# Altium PCB AMS_Slave.PcbDoc (part 2 of 2)
Units mm, origin at the board's own origin, x right, y up, seen from the top; angles counter-clockwise.
Board outline 75.06 x 58.17 mm, 2 copper layers (Top Layer, Bottom Layer); 190 components, 132 nets, 535 pads, 278 vias.
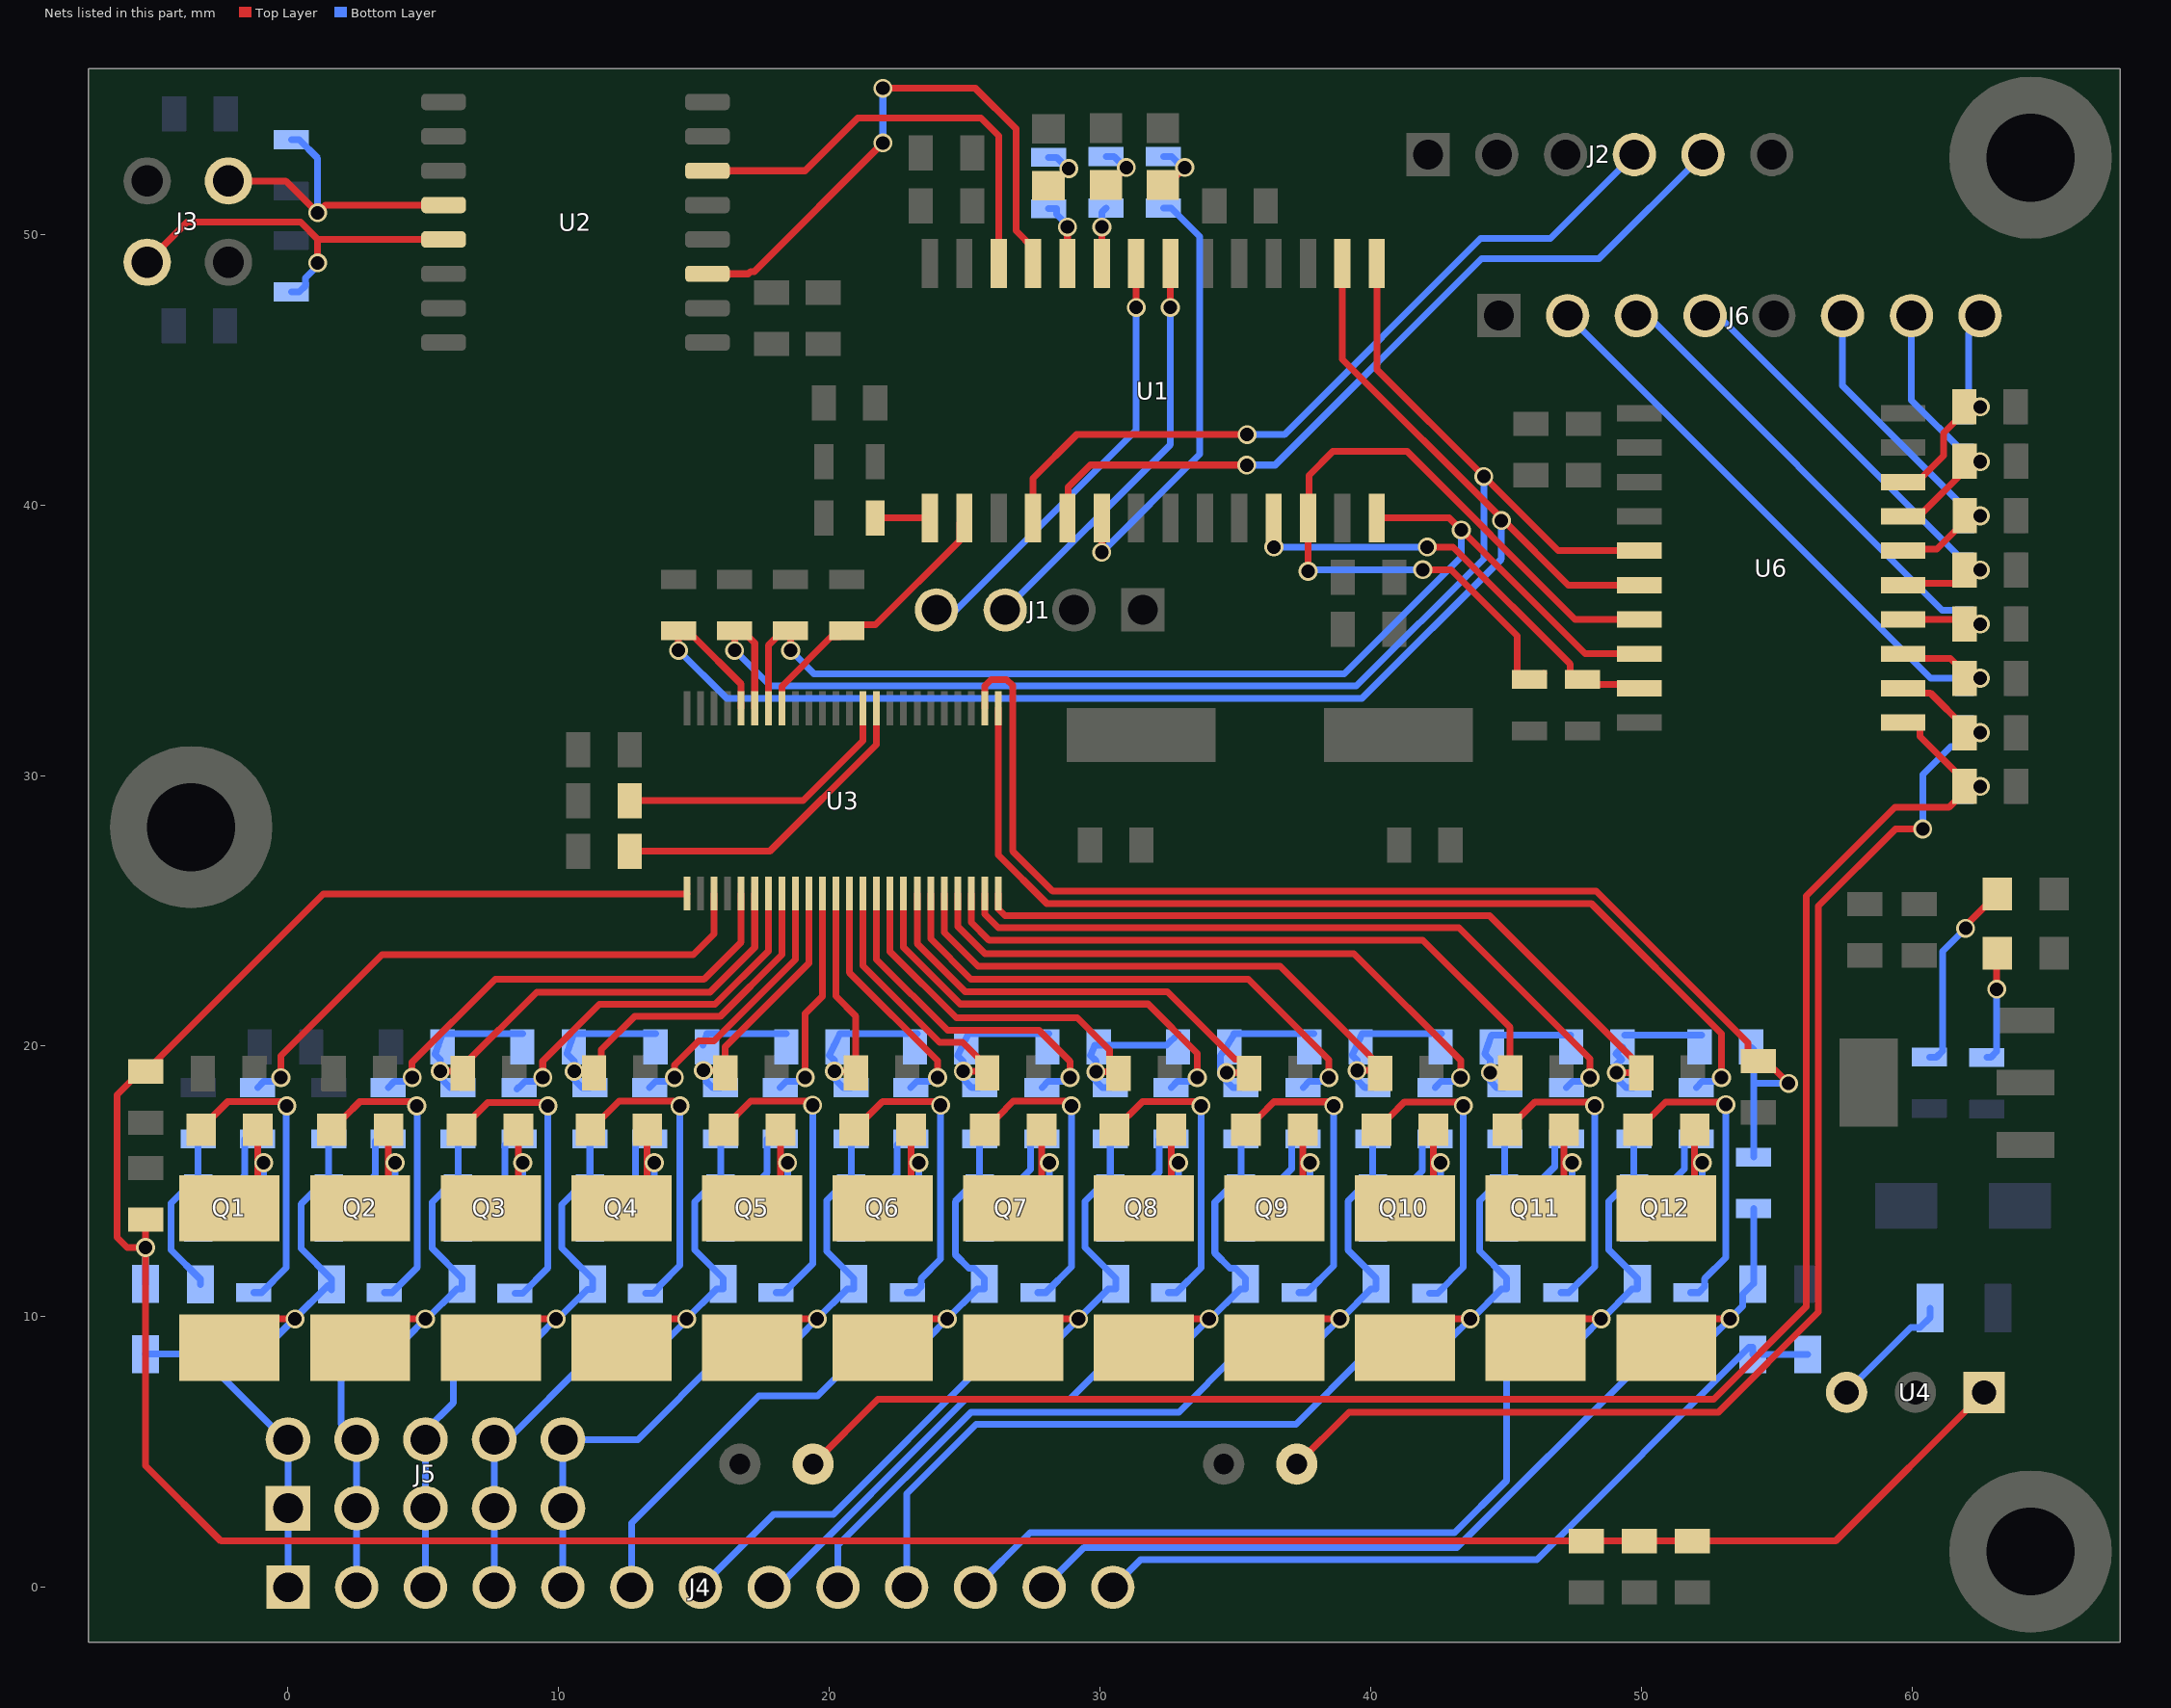
[diagram p2: the nets of this part, all layers, seen from the top]

## Via types
v1: diameter 0.7, hole 0.5, Top Layer to Bottom Layer, 201 vias
v2: diameter 0.8, hole 0.5, Top Layer to Bottom Layer, 76 vias
v3: diameter 0.6, hole 0.5, Top Layer to Bottom Layer, 1 vias

## Nets (pads, with @x,y where several pads share a name; then routed paths per layer and width w, separated by ;. In a path a pad name is that pad's centre, name@x,y a point inside that pad or via, vN(x,y) a via of type N, cw(c..) or ccw(c..) an arc to the next point about the centre after c; other vN are vias at no path point) (continued)
NetC15_2: C15.2 C28.1 C29.2 R46.2 U3.6 | length 21.4
  Top Layer w0.25: v1(5.628,19.076) 6.376,19.076 C15.2@6.459,18.993 6.459,19.267 9.186,21.994 15.593,21.994 17.247,23.649 U3.6@17.247,25.638
  Bottom Layer w0.25: R46.2@6.284,18.468 5.984,18.468 5.759,18.693 5.759,18.722 5.488,18.993 5.57,19.076 v1(5.628,19.076) 5.628,19.499 5.434,19.693 5.556,20.024 5.718,20.465 C29.2@8.668,20.465
NetC16_2: C16.2 C29.1 C30.2 R47.2 U3.8 | length 18
  Top Layer w0.25: v1(10.575,19.068) 11.209,19.068 11.284,18.993 C16.2@11.309,19.018 11.581,19.29 11.581,19.876 12.799,21.094 15.966,21.094 18.247,23.376 U3.8@18.247,25.638
  Bottom Layer w0.25: C29.1@10.559,20.463 10.41,20.018 10.309,19.718 10.575,19.452 v1(10.575,19.068) 10.438,19.068 10.363,18.993 10.634,18.722 10.634,18.693 10.859,18.468 R47.2@11.159,18.468 ; C29.1@10.559,20.465 C30.2@13.584,20.465
NetC17_2: C17.2 C30.1 C31.2 R48.2 U3.10 | length 13.4
  Top Layer w0.25: v1(15.35,19.104) 16.023,19.104 16.134,18.993 C17.2@16.159,19.018 16.159,19.981 19.247,23.069 U3.10@19.247,25.638
  Bottom Layer w0.25: v1@15.188,18.993 15.298,19.104 v1(15.35,19.104) ; C30.1@15.325,20.03 C30.1@15.484,20.439 ; R48.2@15.459,18.722 15.459,18.693 15.461,18.691 15.684,18.468 R48.2@15.984,18.468 ; C30.1@15.484,20.465 C31.2@18.409,20.465
  Bottom Layer w0.254: v1(15.35,19.104) 15.35,18.983 15.461,18.872 R48.2@15.461,18.691
NetC18_2: C18.2 C26.2 C31.1 R49.2 U3.12 | length 13.4
  Top Layer w0.25: v1(20.19,19.071) 20.881,19.071 C18.2@20.959,18.993 ; U3.12@20.247,25.638 20.247,21.846 20.984,21.109 C18.2@20.984,19.018
  Bottom Layer w0.25: C31.1@20.39,20.449 20.184,20.03 20.002,19.661 20.19,19.474 v1(20.19,19.071) 20.091,19.071 20.013,18.993 20.284,18.722 20.284,18.693 20.509,18.468 R49.2@20.809,18.468 ; C31.1@20.39,20.465 C26.2@23.247,20.465
NetC19_2: C19.2 C26.1 C32.2 R50.2 U3.14 | length 15.7
  Top Layer w0.25: U3.14@21.247,25.638 21.247,22.966 24.077,20.136 24.925,20.136 25.834,19.227 C19.2@25.834,19.018 25.809,18.993 25.731,19.071 v1(24.95,19.071)
  Bottom Layer w0.25: C26.1@25.13,20.439 24.933,20.033 24.746,19.648 24.95,19.444 v1(24.95,19.071) 24.841,19.071 24.763,18.993 25.034,18.722 25.034,18.693 25.259,18.468 R50.2@25.559,18.468 ; C26.1@25.13,20.465 C32.2@28.123,20.465
NetC20_2: C20.2 C32.1 C33.2 R51.2 U3.16 | length 19.2
  Top Layer w0.25: U3.16@22.247,25.638 22.247,23.495 24.692,21.05 29.16,21.05 30.359,19.851 30.359,19.518 30.684,19.193 C20.2@30.684,18.993 30.627,19.05 v1(29.853,19.05)
  Bottom Layer w0.25: R51.2@30.384,18.468 30.084,18.468 29.859,18.693 29.859,18.722 29.649,18.931 29.768,19.05 v1(29.853,19.05) 29.853,19.454 29.649,19.658 29.808,20.032 32.464,20.032 C33.2@32.897,20.465
NetC21_2: C21.2 C33.1 C34.2 R52.2 U3.18 | length 23
  Top Layer w0.25: U3.18@23.247,25.638 23.247,23.79 25.026,22.011 32.491,22.011 34.984,19.518 35.184,19.518 35.509,19.193 C21.2@35.509,18.993 35.484,19.018 v1(34.678,19.018)
  Bottom Layer w0.25: C33.1@34.95,20.425 34.697,20.022 34.459,19.643 34.459,18.997 34.48,19.018 v1(34.678,19.018) 34.523,19.018 34.455,18.95 34.684,18.722 34.684,18.693 34.909,18.468 R52.2@35.209,18.468 ; C33.1@34.95,20.465 C34.2@37.9,20.465
NetC22_2: C22.2 C34.1 C35.2 R53.2 U3.20 | length 26.4
  Top Layer w0.25: U3.20@24.247,25.638 24.247,24.2 25.491,22.956 36.658,22.956 40.35,19.264 C22.2@40.35,18.993 40.243,19.1 v1(39.503,19.1)
  Bottom Layer w0.25: C34.1@39.678,20.444 39.492,20.032 39.321,19.655 39.503,19.474 v1(39.503,19.1) 39.462,19.1 39.321,18.959 39.559,18.722 39.559,18.693 39.784,18.468 R53.2@40.084,18.468 ; C34.1@39.678,20.465 C35.2@42.628,20.465
NetC23_2: C23.2 C35.1 C36.2 R54.2 U3.22 | length 30.6
  Top Layer w0.25: U3.22@25.247,25.638 25.247,24.568 25.899,23.916 41.935,23.916 45.159,20.692 C23.2@45.159,19.018 45.134,18.993 45.102,19.025 v1(44.425,19.025)
  Bottom Layer w0.25: R54.2@44.959,18.468 44.659,18.468 44.434,18.693 44.434,18.722 44.222,18.934 44.313,19.025 v1(44.425,19.025) 44.425,19.502 44.222,19.706 44.333,20.021 44.471,20.413 C36.2@47.396,20.413
NetC24_2: C24.2 C36.1 C37.2 R55.2 U3.24 | length 33.2
  Top Layer w0.25: U3.24@26.247,25.638 26.247,25.078 26.5,24.825 44.395,24.825 50.002,19.218 C24.2@50.002,19.018 v1(49.087,19.018) v1@49.192,19.123
  Bottom Layer w0.25: C36.1@49.309,19.968 49.062,19.721 49.275,19.508 49.087,19.319 v1(49.087,19.018) 49.154,19.018 49.062,18.925 49.209,18.778 49.209,18.693 49.434,18.468 R55.2@49.734,18.468 ; C36.1@49.383,20.413 C37.2@52.233,20.413
NetC25_2: C25.2 C37.1 R56.2 U3.26 | length 46
  Top Layer w0.25: U3.26@25.747,32.488 25.747,33.318 25.979,33.55 26.55,33.55 26.775,33.325 26.775,27.2 28.25,25.725 48.341,25.725 53.939,20.127 53.939,19.773 54.264,19.448 C25.2@54.32,19.448 54.52,19.448 54.845,19.123 54.943,19.123 v1(55.443,18.623)
  Bottom Layer w0.25: C37.1@54.059,19.968 54.152,19.875 54.152,18.623 ; R56.2@54.152,15.901 54.152,18.623 ; v1(55.443,18.623) 54.152,18.623
NetC38_1: C38.1 C39.1 C43.2 C44.2 C45.2 FB1.2 U3.1 U4.1 | length 112.4
  Top Layer w0.25: C39.1@-5.246,13.593 -5.266,13.573 v1(-5.266,12.558) ; U3.1@14.747,25.638 14.747,25.621 1.306,25.621 C38.1@-5.246,19.068 -5.446,19.068 -6.311,18.204 -6.311,12.936 -5.933,12.558 v1(-5.266,12.558) ; U4.1@62.67,7.202 57.177,1.709 C45.2@51.892,1.709 C44.2@49.932,1.709 C43.2@47.972,1.709 -2.476,1.709 -5.266,4.499 v1(-5.266,12.558)
  Bottom Layer w0.25: FB1.2@-5.266,11.218 v1(-5.266,12.558)
NetC40_2: C40.2 U3.34 | length 12.1
  Top Layer w0.25: C40.2@12.625,27.2 17.8,27.2 21.747,31.147 U3.34@21.747,32.488
NetC41_2: C41.2 U3.35 | length 10.7
  Top Layer w0.25: C41.2@12.625,29.075 19.039,29.075 21.247,31.283 U3.35@21.247,32.488
NetC48_2: C48.2 R63.1 RT1.2 U6.1 | length 65.6
  Top Layer w0.25: RT1.2@19.4,4.55 21.8,6.95 52.675,6.95 56.1,10.375 56.1,25.55 59.375,28.825 61.375,28.825 61.95,29.4 C48.2@61.95,29.6 61.95,29.8 60.3,31.45 60.3,31.96 U6.1@59.675,31.96
  other v1: 62.525,29.6
NetC49_2: C49.2 R64.1 RT2.2 U6.2 | length 49.1
  Top Layer w0.25: RT2.2@37.275,4.55 39.2,6.475 52.85,6.475 56.55,10.175 56.55,25.175 59.4,28.025 v1(60.4,28.025) ; U6.2@59.675,33.23 59.85,33.055 60.681,33.055 61.95,31.786 C49.2@61.95,31.586
  Bottom Layer w0.25: v1(60.4,28.025) 60.4,30.036 61.435,31.071 61.725,31.071 61.95,31.296 R64.1@61.95,31.586
  other v1: 62.525,31.586
NetC50_2: C50.2 J6.2 R65.1 U6.3 | length 23.3
  Top Layer w0.25: U6.3@59.675,34.5 59.85,34.325 61.421,34.325 61.95,33.796 C50.2@61.95,33.596
  Bottom Layer w0.25: J6.2@47.281,47 60.685,33.596 R65.1@61.95,33.596 R65.1@61.95,33.878
  other v1: 62.525,33.596
NetC51_2: C51.2 J6.3 R66.1 U6.4 | length 19.6
  Top Layer w0.25: U6.4@59.675,35.77 61.78,35.77 C51.2@61.95,35.6 C51.2@61.95,35.4
  Bottom Layer w0.25: J6.3@49.821,47 50.037,46.784 50.452,46.784 61.121,36.115 61.725,36.115 61.95,35.89 R66.1@61.95,35.6
  other v1: 62.525,35.6
NetC52_2: C52.2 J6.4 R67.1 U6.5 | length 16.4
  Top Layer w0.25: U6.5@59.675,37.04 59.735,37.1 61.925,37.1 61.95,37.125 C52.2@61.95,37.6
  Bottom Layer w0.25: J6.4@52.361,47 52.84,47 61.95,37.89 R67.1@61.95,37.6
  other v1: 62.525,37.6
NetC53_2: C53.2 J6.6 R68.1 U6.6 | length 12.2
  Top Layer w0.25: U6.6@59.675,38.31 59.738,38.373 60.929,38.373 61.956,39.4 C53.2@61.956,39.6
  Bottom Layer w0.25: J6.6@57.441,47 57.441,44.405 61.956,39.89 R68.1@61.956,39.6
  other v1: 62.525,39.6
NetC54_2: C54.2 J6.7 R69.1 U6.7 | length 9.5
  Top Layer w0.25: U6.7@59.675,39.58 59.8,39.705 60.38,39.705 61.95,41.275 C54.2@61.95,41.614
  Bottom Layer w0.25: J6.7@59.981,47 59.981,43.873 61.95,41.904 R69.1@61.95,41.614
  other v1: 62.525,41.6
NetC55_2: C55.2 J6.8 R70.1 U6.8 | length 7.6
  Top Layer w0.25: U6.8@59.675,40.85 59.79,40.965 60.315,40.965 61.175,41.825 61.175,42.663 61.937,43.425 C55.2@61.937,43.625
  Bottom Layer w0.25: R70.1@61.937,43.625 62.1,43.788 62.1,46.342 62.521,46.763 J6.8@62.521,47
  other v1: 62.525,43.625
NetD1_2: D1.2 R3.1 | length 1.9
  Top Layer w0.25: D1.2@28.1,51.8 28.222,51.8 v1(28.852,52.431)
  Bottom Layer w0.25: R3.1@28.1,52.85 28.4,52.85 28.819,52.431 v1(28.852,52.431)
NetD2_2: D2.2 R4.1 | length 1.9
  Top Layer w0.25: D2.2@30.225,51.825 30.325,51.825 v1(30.975,52.474)
  Bottom Layer w0.25: R4.1@30.225,52.875 30.525,52.875 30.925,52.475 v1(30.975,52.474)
NetD3_2: D3.2 R6.1 | length 2
  Top Layer w0.25: D3.2@32.325,51.825 32.486,51.825 v1(33.135,52.474)
  Bottom Layer w0.25: R6.1@32.35,52.875 32.65,52.875 33.003,52.522 33.087,52.522 v1(33.135,52.474)
NetD4_1: D4.1 R8.2 | length 11.3
  Top Layer w0.25: D4.1@-3.209,16.862 D4.1@-3.209,16.912 -3.209,16.962 -2.228,17.943 -0.259,17.943 -0.109,17.793 v1(-0.041,17.793)
  Bottom Layer w0.25: R8.2@-1.266,10.893 -0.976,10.893 -0.066,11.803 -0.066,17.768 v1(-0.041,17.793)
NetD4_2: D4.2 Q1.3 R20.2 | length 5.1
  Top Layer w0.25: R20.2@-2.159,14.005 -1.109,15.055 D4.2@-1.109,16.912
  Bottom Layer w0.25: Q1.3@-1.016,14.018 -0.895,14.139 v1(-0.895,15.691)
NetD5_1: D5.1 R9.2 | length 11.2
  Top Layer w0.25: D5.1@1.617,16.912 1.617,16.962 2.042,17.387 2.092,17.387 2.648,17.943 4.541,17.943 4.691,17.793 v1(4.759,17.793)
  Bottom Layer w0.25: R9.2@3.559,10.893 3.849,10.893 4.784,11.828 4.784,17.768 v1(4.759,17.793)
NetD5_2: D5.2 Q2.3 R21.2 | length 5.1
  Top Layer w0.25: R21.2@2.667,14.005 3.717,15.055 D5.2@3.717,16.912
  Bottom Layer w0.25: Q2.3@3.809,14.018 3.959,14.168 v1(3.959,15.691)
NetD6_1: D6.1 R10.2 | length 11.3
  Top Layer w0.25: D6.1@6.409,16.912 6.409,16.943 7.384,17.918 9.416,17.918 9.541,17.793 v1(9.609,17.793)
  Bottom Layer w0.25: R10.2@8.384,10.868 8.674,10.868 9.609,11.803 v1(9.609,17.793)
NetD6_2: D6.2 Q3.3 R22.2 | length 5
  Top Layer w0.25: R22.2@7.493,14.005 8.509,15.021 D6.2@8.509,16.912
  Bottom Layer w0.25: Q3.3@8.584,14.018 8.674,14.108 v1(8.674,15.693)
NetD7_1: D7.1 R11.2 | length 11.5
  Top Layer w0.25: D7.1@11.176,16.912 11.176,16.962 11.601,17.387 11.651,17.387 12.232,17.968 14.241,17.968 14.416,17.793 v1(14.484,17.793)
  Bottom Layer w0.25: R11.2@13.209,10.868 13.509,10.868 13.734,11.093 13.734,11.143 14.484,11.893 v1(14.484,17.793)
NetD7_2: D7.2 Q4.3 R23.2 | length 5
  Top Layer w0.25: R23.2@12.319,14.005 13.276,14.962 D7.2@13.276,16.912
  Bottom Layer w0.25: Q4.3@13.459,14.018 13.534,14.093 v1(13.534,15.691)
NetD8_1: D8.1 R12.2 | length 11.5
  Top Layer w0.25: D8.1@16.095,16.912 16.095,16.962 17.101,17.968 19.166,17.968 19.316,17.818 v1(19.384,17.818)
  Bottom Layer w0.25: R12.2@18.034,10.893 18.324,10.893 19.384,11.953 v1(19.384,17.818)
NetD8_2: D8.2 Q5.3 R24.2 | length 5.1
  Top Layer w0.25: R24.2@17.145,14.005 18.195,15.055 D8.2@18.195,16.912
  Bottom Layer w0.25: Q5.3@18.284,14.018 18.459,14.193 v1(18.459,15.691)
NetD9_1: D9.1 R13.2 | length 11.3
  Top Layer w0.25: D9.1@20.921,16.912 20.921,16.962 21.346,17.387 21.396,17.387 21.965,17.956 23.91,17.956 24.048,17.818 v1(24.116,17.818)
  Bottom Layer w0.25: R13.2@22.884,10.893 23.174,10.893 23.399,11.118 23.399,11.408 24.116,12.125 v1(24.116,17.818)
NetD9_2: D9.2 Q6.3 R25.2 | length 5.1
  Top Layer w0.25: R25.2@21.971,14.005 23.021,15.055 D9.2@23.021,16.912
  Bottom Layer w0.25: Q6.3@23.109,14.018 23.134,14.018 23.309,14.193 v1(23.309,15.691)
NetD10_1: D10.1 R14.2 | length 11.3
  Top Layer w0.25: D10.1@25.747,16.912 25.747,16.962 26.172,17.387 26.222,17.387 26.798,17.963 28.713,17.963 28.879,17.797 v1(28.947,17.797)
  Bottom Layer w0.25: R14.2@27.709,10.893 27.999,10.893 28.947,11.84 v1(28.947,17.797)
NetD10_2: D10.2 Q7.3 R26.2 | length 5.2
  Top Layer w0.25: R26.2@26.797,14.005 27.847,15.055 D10.2@27.847,16.912
  Bottom Layer w0.25: Q7.3@27.859,14.018 27.959,14.018 28.134,14.193 v1(28.134,15.691)
NetD11_1: D11.1 R15.2 | length 11.3
  Top Layer w0.25: D11.1@30.539,16.912 31.57,17.943 33.52,17.943 33.666,17.797 v1(33.734,17.797)
  Bottom Layer w0.25: R15.2@32.534,10.893 32.824,10.893 33.734,11.803 v1(33.734,17.797)
NetD11_2: D11.2 Q8.3 R27.2 | length 5.1
  Top Layer w0.25: R27.2@31.623,14.005 32.639,15.021 D11.2@32.639,16.912
  Bottom Layer w0.25: Q8.3@32.684,14.018 32.729,14.018 32.904,14.193 v1@32.904,15.693
  other v1: 32.904,15.691
NetD12_1: D12.1 R16.2 | length 11.4
  Top Layer w0.25: D12.1@35.399,16.912 35.399,16.962 35.824,17.387 35.874,17.387 36.43,17.943 38.426,17.943 38.571,17.797 v1(38.639,17.797)
  Bottom Layer w0.25: R16.2@37.359,10.893 37.649,10.893 38.639,11.883 v1(38.639,17.797)
NetD12_2: D12.2 Q9.3 R28.2 | length 5.2
  Top Layer w0.25: R28.2@36.449,14.005 37.499,15.055 D12.2@37.499,16.912
  Bottom Layer w0.25: Q9.3@37.509,14.018 37.588,14.018 37.763,14.193 v1(37.763,15.691)
NetD13_1: D13.1 R17.2 | length 11.3
  Top Layer w0.25: D13.1@40.225,16.912 40.225,16.962 40.65,17.387 40.7,17.387 41.255,17.942 43.217,17.942 43.362,17.797 v1@43.429,17.797
  Bottom Layer w0.25: R17.2@42.184,10.868 42.474,10.868 43.429,11.823 v1@43.429,17.797
  other v1: 43.429,17.796
NetD13_2: D13.2 Q10.3 R29.2 | length 5.1
  Top Layer w0.25: R29.2@41.275,14.005 42.325,15.055 D13.2@42.325,16.912
  Bottom Layer w0.25: Q10.3@42.384,14.018 42.406,14.018 42.581,14.193 v1(42.581,15.691)
NetD14_1: D14.1 R18.2 | length 11.2
  Top Layer w0.25: D14.1@45.051,16.912 46.081,17.942 48.064,17.942 v1@48.21,17.796
  Bottom Layer w0.25: R18.2@47.034,10.893 47.324,10.893 48.278,11.847 v1(48.278,17.796)
NetD14_2: D14.2 Q11.3 R30.2 | length 5.1
  Top Layer w0.25: R30.2@46.101,14.005 47.151,15.055 D14.2@47.151,16.912
  Bottom Layer w0.25: Q11.3@47.234,14.018 47.273,14.018 47.448,14.193 v1(47.448,15.691)
NetD15_1: D15.1 R19.2 | length 11.4
  Top Layer w0.25: D15.1@49.877,16.912 50.902,17.937 53.023,17.937 v1(53.123,17.837)
  Bottom Layer w0.25: R19.2@51.834,10.893 52.124,10.893 52.349,11.118 52.349,11.408 53.123,12.182 v1(53.123,17.837)
NetD15_2: D15.2 Q12.3 R31.2 | length 5.1
  Top Layer w0.25: R31.2@50.927,14.005 51.977,15.055 D15.2@51.977,16.912
  Bottom Layer w0.25: Q12.3@52.034,14.018 52.083,14.018 52.258,14.193 v1(52.258,15.691)
NetD17_2: D17.2 R61.1 | length 7.2
  Top Layer w0.25: v1(61.988,24.354) 62.036,24.402 62.036,24.507 62.681,25.152 62.731,25.152 63.156,25.577 D17.2@63.156,25.627
  Bottom Layer w0.25: R61.1@60.653,19.597 60.912,19.597 61.137,19.822 61.137,23.503 v1(61.988,24.354)
NetD18_2: D18.2 R62.1 | length 4.1
  Top Layer w0.25: v1(63.137,22.104) 63.137,23.416 D18.2@63.156,23.435
  Bottom Layer w0.25: R62.1@62.774,19.581 62.912,19.581 63.137,19.806 v1(63.137,22.104)
NetF1_1: F1.1 U4.3 | length 4.6
  Bottom Layer w0.25: U4.3@57.59,7.202 57.59,7.23 59.966,9.606 60.306,9.606 60.681,9.981 F1.1@60.681,10.321
NetFB1_1: FB1.1 FB2.1 J4.1 J5.1 J5.2 | length 12
  Bottom Layer w0.25: FB1.1@-5.266,8.618 -3.266,8.618 FB2.1@-3.241,8.593 -0.109,5.461 J5.2@0,5.461 J5.1@0,2.921 J4.1@0,0
NetFB2_2: FB2.2 Q1.2 R44.1 | length 6.4
  Bottom Layer w0.25: R44.1@-3.316,16.568 Q1.2@-3.316,14.968 -3.541,14.968 -4.316,14.193 -4.316,12.468 -3.241,11.393 FB2.2@-3.241,11.193
NetFB3_1: FB3.1 J4.2 J5.3 J5.4 | length 9
  Bottom Layer w0.25: FB3.1@1.609,8.593 1.959,8.243 1.959,6.042 J5.4@2.54,5.461 J5.3@2.54,2.921 J4.2@2.54,0
NetFB3_2: FB3.2 Q2.2 R8.1 R20.1 R45.1 | length 13.3
  Top Layer w0.25: R20.1@-2.159,8.855 -1.096,9.918 v1(0.259,9.918)
  Bottom Layer w0.25: R8.1@-1.266,8.993 -1.041,9.218 -0.466,9.218 0.246,9.931 1.459,11.143 1.609,10.993 FB3.2@1.609,11.193 1.609,11.393 0.484,12.518 0.484,14.168 1.284,14.968 Q2.2@1.509,14.968 R45.1@1.509,16.568
NetFB4_1: FB4.1 J4.3 J5.5 J5.6 | length 9.2
  Bottom Layer w0.25: J4.3@5.08,0 J5.5@5.08,2.921 J5.6@5.08,5.461 5.08,5.789 6.109,6.818 6.109,8.293 FB4.1@6.434,8.618
NetFB4_2: FB4.2 Q3.2 R9.1 R21.1 R46.1 | length 13.1
  Top Layer w0.25: R21.1@2.667,8.855 3.73,9.918 v1(5.08,9.918)
  Bottom Layer w0.25: R9.1@3.559,8.993 3.784,9.218 4.38,9.218 v1(5.08,9.918) 5.134,9.918 6.234,11.018 6.434,11.018 FB4.2@6.434,11.218 6.434,11.418 5.323,12.529 5.323,14.232 6.059,14.968 Q3.2@6.284,14.968 R46.1@6.284,16.568
NetFB5_1: FB5.1 J4.4 J5.7 J5.8 | length 10.6
  Bottom Layer w0.25: J4.4@7.62,0 J5.7@7.62,2.921 J5.8@7.62,5.461 8.117,5.461 11.159,8.503 11.259,8.403 FB5.1@11.259,8.603
NetFB5_2: FB5.2 Q4.2 R10.1 R22.1 R47.1 | length 13.2
  Top Layer w0.25: R22.1@7.493,8.855 8.556,9.918 v1(9.909,9.918)
  Bottom Layer w0.25: R10.1@8.384,8.968 8.609,9.193 9.184,9.193 v1(9.909,9.918) 9.974,9.918 11.059,11.003 11.259,11.003 FB5.2@11.259,11.203 11.259,11.403 10.884,11.778 10.874,11.778 10.113,12.539 10.113,14.147 10.934,14.968 Q4.2@11.159,14.968 R47.1@11.159,16.568
NetFB6_1: FB6.1 J4.5 J5.9 J5.10 | length 12.7
  Bottom Layer w0.25: J4.5@10.16,0 J5.9@10.16,2.921 J5.10@10.16,5.461 12.927,5.461 FB6.1@16.084,8.618
NetFB6_2: FB6.2 Q5.2 R11.1 R23.1 R48.1 | length 13.1
  Top Layer w0.25: R23.1@12.319,8.855 13.382,9.918 v1(14.734,9.918)
  Bottom Layer w0.25: R11.1@13.209,8.968 13.412,9.171 14.037,9.171 14.734,9.868 v1(14.734,9.918) 15.834,11.018 16.084,11.018 FB6.2@16.084,11.218 16.084,11.418 15.034,12.468 15.034,14.243 15.759,14.968 Q5.2@15.984,14.968 R48.1@15.984,16.568
NetFB7_1: FB7.1 J4.6 | length 13.3
  Bottom Layer w0.25: J4.6@12.7,0 12.7,2.375 17.4,7.075 19.566,7.075 20.909,8.418 FB7.1@20.909,8.618
NetFB7_2: FB7.2 Q6.2 R12.1 R24.1 R49.1 | length 13
  Top Layer w0.25: R24.1@17.145,8.855 18.208,9.918 v1(19.559,9.918)
  Bottom Layer w0.25: R12.1@18.034,8.993 18.249,9.208 18.849,9.208 v1(19.559,9.918) 20.659,11.018 20.909,11.018 FB7.2@20.909,11.218 20.909,11.418 19.909,12.418 19.909,12.607 19.905,12.611 19.905,13.525 19.909,13.529 19.909,14.307 20.57,14.968 Q6.2@20.809,14.968 R49.1@20.809,16.568
NetFB8_1: FB8.1 J4.7 | length 14.3
  Bottom Layer w0.25: J4.7@15.24,0 17.94,2.7 20.15,2.7 25.734,8.284 FB8.1@25.734,8.618
NetFB8_2: FB8.2 Q7.2 R13.1 R25.1 R50.1 | length 13.1
  Top Layer w0.25: R25.1@21.971,8.855 23.034,9.918 v1(24.359,9.918)
  Bottom Layer w0.25: R13.1@22.884,8.993 23.109,9.218 23.659,9.218 v1(24.359,9.918) 25.459,11.018 25.734,11.018 FB8.2@25.734,11.218 25.734,11.418 25.359,11.793 25.159,11.793 24.654,12.298 24.654,14.256 25.365,14.968 Q7.2@25.559,14.968 R50.1@25.559,16.568
NetFB9_1: FB9.1 J4.8 | length 16.5
  Bottom Layer w0.25: J4.8@17.78,0 18.086,0 25.036,6.95 28.891,6.95 30.359,8.418 30.584,8.418 FB9.1@30.584,8.618
NetFB9_2: FB9.2 Q8.2 R14.1 R26.1 R51.1 | length 13.1
  Top Layer w0.25: R26.1@26.797,8.855 27.418,9.476 27.931,9.476 28.373,9.918 v1(29.209,9.918)
  Bottom Layer w0.25: R14.1@27.709,8.993 27.934,9.218 28.509,9.218 v1(29.209,9.918) 30.309,11.018 30.584,11.018 FB9.2@30.584,11.218 30.584,11.418 29.451,12.551 29.451,14.26 30.159,14.968 Q8.2@30.384,14.968 R51.1@30.384,16.568
NetFB10_1: FB10.1 J4.9 | length 19.5
  Bottom Layer w0.25: J4.9@20.32,0 20.32,1.556 25.239,6.475 32.916,6.475 35.059,8.618 FB10.1@35.384,8.618
NetFB10_2: FB10.2 Q9.2 R15.1 R27.1 R52.1 | length 13.2
  Top Layer w0.25: R27.1@31.623,8.855 32.686,9.918 v1(34.034,9.918)
  Bottom Layer w0.25: R15.1@32.534,8.993 32.759,9.218 33.334,9.218 v1(34.034,9.918) 34.084,9.918 35.184,11.018 35.384,11.018 FB10.2@35.384,11.218 35.384,11.418 35.009,11.793 34.809,11.793 34.247,12.355 34.247,14.231 34.984,14.968 Q9.2@35.209,14.968 R52.1@35.209,16.568
NetFB11_1: FB11.1 J4.10 | length 23.2
  Bottom Layer w0.25: J4.10@22.86,0 22.86,3.46 25.425,6.025 37.241,6.025 39.819,8.603 40.024,8.603 40.209,8.418 FB11.1@40.209,8.618
NetFB11_2: FB11.2 Q10.2 R16.1 R28.1 R53.1 | length 13
  Top Layer w0.25: R28.1@36.449,8.855 37.519,9.925 v1(38.866,9.925)
  Bottom Layer w0.25: R16.1@37.359,8.993 37.584,9.218 38.16,9.218 v1(38.866,9.925) 38.916,9.925 40.009,11.018 40.209,11.018 FB11.2@40.209,11.218 40.209,11.418 39.162,12.465 39.162,14.271 39.859,14.968 Q10.2@40.084,14.968 R53.1@40.084,16.568
NetFB12_1: FB12.1 J4.11 | length 25.9
  Bottom Layer w0.25: J4.11@25.4,0 27.425,2.025 43.109,2.025 45.034,3.95 FB12.1@45.034,8.618
NetFB12_2: FB12.2 Q11.2 R17.1 R29.1 R54.1 | length 13
  Top Layer w0.25: R29.1@41.275,8.855 42.345,9.925 v1(43.685,9.925)
  Bottom Layer w0.25: R17.1@42.184,8.968 42.409,9.193 42.953,9.193 v1(43.685,9.925) 43.741,9.925 44.834,11.018 45.034,11.018 FB12.2@45.034,11.218 45.034,11.418 44.023,12.429 44.023,14.282 44.709,14.968 Q11.2@44.934,14.968 44.959,14.993 R54.1@44.959,16.568
NetFB13_1: FB13.1 J4.12 | length 26.2
  Bottom Layer w0.25: J4.12@27.94,0 29.415,1.475 43.195,1.475 49.988,8.268 49.988,8.288 FB13.1@49.859,8.418 ; FB13.1@49.859,8.618 49.859,8.518 FB13.1@49.859,8.418 ; FB13.1@49.859,8.418 49.759,8.518 FB13.1@49.859,8.418
NetFB13_2: FB13.2 Q12.2 R18.1 R30.1 R55.1 | length 13
  Top Layer w0.25: R30.1@46.101,8.855 47.171,9.925 v1(48.521,9.925)
  Bottom Layer w0.25: R18.1@47.034,8.993 47.259,9.218 47.815,9.218 v1(48.521,9.925) 48.566,9.925 49.659,11.018 49.859,11.018 FB13.2@49.859,11.218 49.859,11.418 48.807,12.47 48.807,14.266 49.509,14.968 Q12.2@49.734,14.968 R55.1@49.734,16.568
NetFB14_1: FB14.1 FB15.1 J4.13 | length 29.6
  Bottom Layer w0.25: J4.13@30.48,0 31.505,1.025 46.141,1.025 53.984,8.868 54.125,8.868 FB14.1@54.125,8.603 FB15.1@56.157,8.603
NetFB14_2: FB14.2 R19.1 R31.1 R56.1 | length 9.1
  Top Layer w0.25: R31.1@50.927,8.855 51.997,9.925 v1(53.282,9.925)
  Bottom Layer w0.25: R19.1@51.834,8.993 52.059,9.218 52.575,9.218 v1(53.282,9.925) 53.75,10.393 53.75,10.828 FB14.2@54.125,11.203 54.152,11.23 R56.1@54.152,14.001
NetJ1_3: J1.3 U1.21 | length 15.3
  Top Layer w0.25: v1(32.6,47.3) 32.6,48.915 U1.21@32.61,48.925
  Bottom Layer w0.25: J1.3@26.5,36.125 32.6,42.225 v1(32.6,47.3)
NetJ1_4: J1.4 U1.22 | length 16.3
  Top Layer w0.25: v1(31.34,47.3) U1.22@31.34,48.925
  Bottom Layer w0.25: J1.4@23.96,36.125 24.7,36.125 31.34,42.765 v1(31.34,47.3)
NetJ2_4: J2.4 U1.4 | length 28.6
  Top Layer w0.254: U1.4@27.53,39.525 27.53,40.99 29.14,42.6 v1(35.436,42.6)
  Bottom Layer w0.254: v1@35.425,42.6 v1(35.436,42.6) 36.82,42.6 44.07,49.85 46.645,49.85 J2.4@49.745,52.95
NetJ2_5: J2.5 U1.5 | length 29.7
  Top Layer w0.254: U1.5@28.8,39.525 28.832,39.557 28.832,40.657 29.65,41.475 v1(35.425,41.475)
  Bottom Layer w0.254: v1(35.425,41.475) 36.475,41.475 44.1,49.1 48.435,49.1 J2.5@52.285,52.95
NetJ3_2: J3.2 R5.2 U2.13 | length 14.3
  Top Layer w0.25: J3.2@-5.2,48.975 -3.725,50.45 0.465,50.45 1.1,49.815 ; v1(1.1,48.95) 1.1,49.815 ; U2.13@5.75,49.815 1.1,49.815
  Bottom Layer w0.25: R5.2@0.125,47.875 0.415,47.875 0.64,48.1 0.64,48.39 1.052,48.802 1.052,48.902 v1(1.1,48.95)
NetJ3_3: J3.3 R7.2 U2.12 | length 11.8
  Top Layer w0.25: J3.3@-2.2,51.975 -0.075,51.975 v1(1.1,50.8) 1.385,51.085 U2.12@5.75,51.085
  Bottom Layer w0.25: R7.2@0.125,53.5 0.415,53.5 1.1,52.815 v1(1.1,50.8)
NetQ1_1: Q1.1 R32.1 | length 4.7
  Bottom Layer w0.25: Q1.1@-3.316,13.068 -3.237,13.068 -3.062,13.243 -3.062,13.747 -1.591,15.218 -1.591,16.568 R32.1@-1.118,16.568
NetQ2_1: Q2.1 R33.1 | length 4.7
  Bottom Layer w0.25: Q2.1@1.509,13.068 1.588,13.068 1.763,13.243 1.763,13.772 3.234,15.243 3.234,16.493 3.309,16.568 R33.1@3.708,16.568
NetQ3_1: Q3.1 R34.1 | length 4.7
  Bottom Layer w0.25: Q3.1@6.284,13.068 6.413,13.068 6.588,13.243 6.588,13.697 8.009,15.118 8.009,16.043 8.019,16.053 8.019,16.343 8.244,16.568 R34.1@8.534,16.568
NetQ4_1: Q4.1 R35.1 | length 4.6
  Bottom Layer w0.25: Q4.1@11.159,13.068 11.238,13.068 11.413,13.243 11.413,13.722 12.834,15.143 12.834,16.042 12.845,16.053 12.845,16.343 13.07,16.568 R35.1@13.36,16.568
NetQ5_1: Q5.1 R36.1 | length 4.7
  Bottom Layer w0.25: Q5.1@15.984,13.068 16.234,13.318 16.234,13.843 17.709,15.318 17.709,16.568 R36.1@18.186,16.568
NetQ6_1: Q6.1 R37.1 | length 4.8
  Bottom Layer w0.25: Q6.1@20.809,13.068 21.109,13.068 21.109,13.868 22.509,15.268 22.509,16.343 22.734,16.568 R37.1@23.012,16.568
NetQ7_1: Q7.1 R38.1 | length 4.7
  Bottom Layer w0.25: Q7.1@25.559,13.068 25.663,13.068 25.838,13.243 25.838,13.847 27.434,15.443 27.434,16.518 27.484,16.568 R38.1@27.859,16.568
NetQ8_1: Q8.1 R39.1 | length 4.9
  Bottom Layer w0.25: Q8.1@30.384,13.068 30.734,13.068 30.734,13.893 32.184,15.343 32.184,16.568 R39.1@32.634,16.568
NetQ9_1: Q9.1 R40.1 | length 4.9
  Bottom Layer w0.25: Q9.1@35.209,13.068 35.566,13.068 35.566,13.951 37.082,15.467 37.082,16.568 R40.1@37.509,16.568
NetQ10_1: Q10.1 R41.1 | length 4.9
  Bottom Layer w0.25: Q10.1@40.084,13.068 40.421,13.068 40.421,13.897 41.911,15.387 41.911,16.559 41.92,16.568 R41.1@42.384,16.568
NetQ11_1: Q11.1 R42.1 | length 4.8
  Bottom Layer w0.25: Q11.1@44.934,13.068 45.039,13.068 45.214,13.243 45.214,13.953 46.799,15.537 46.799,16.561 46.806,16.568 R42.1@47.234,16.568
NetQ12_1: Q12.1 R43.1 | length 4.7
  Bottom Layer w0.25: Q12.1@49.734,13.068 49.846,13.068 50.021,13.243 50.021,13.886 51.597,15.462 51.597,16.518 51.647,16.568 R43.1@52.034,16.568
NetR2_2: R2.2 U1.1 | length 2
  Top Layer w0.25: R2.2@21.7,39.525 U1.1@23.72,39.525
NetR3_2: R3.2 U1.24 | length 2.5
  Top Layer w0.25: U1.24@28.8,48.925 v1(28.8,50.275)
  Bottom Layer w0.25: R3.2@28.1,50.95 28.4,50.95 28.4,50.743 28.8,50.343 v1(28.8,50.275)
NetR4_2: R4.2 U1.23 | length 2.1
  Top Layer w0.25: U1.23@30.07,48.925 v1(30.07,50.275)
  Bottom Layer w0.25: v1(30.07,50.275) 30.07,50.82 R4.2@30.225,50.975
NetR6_2: R6.2 U1.6 | length 16.2
  Top Layer w0.25: v1(30.069,38.254) 30.069,39.524 U1.6@30.07,39.525
  Bottom Layer w0.25: v1(30.069,38.254) 33.692,41.877 33.692,49.923 32.64,50.975 R6.2@32.35,50.975
NetR32_2: R32.2 U3.3 | length 21.2
  Top Layer w0.25: v1(-0.261,18.836) -0.261,19.636 3.482,23.38 14.98,23.38 15.747,24.147 U3.3@15.747,25.638
  Bottom Layer w0.25: R32.2@-1.118,18.468 -0.893,18.693 -0.471,18.693 -0.329,18.836 v1(-0.261,18.836)
NetR33_2: R33.2 U3.5 | length 17.4
  Top Layer w0.25: v1(4.589,18.84) 4.589,19.408 7.661,22.48 15.376,22.48 16.747,23.85 U3.5@16.747,25.638
  Bottom Layer w0.25: R33.2@3.708,18.468 3.933,18.693 4.366,18.693 4.522,18.849 v1@4.589,18.849
NetR34_2: R34.2 U3.7 | length 13.9
  Top Layer w0.25: v1(9.414,18.84) 9.414,19.446 11.512,21.544 15.779,21.544 17.747,23.512 U3.7@17.747,25.638
  Bottom Layer w0.25: R34.2@8.457,18.42 8.505,18.468 R34.2@8.534,18.468 8.759,18.693 9.2,18.693 9.346,18.84 v1(9.414,18.84)
NetR35_2: R35.2 U3.9 | length 10.1
  Top Layer w0.25: v1(14.278,18.84) 14.278,19.307 15.168,20.198 15.739,20.198 18.747,23.205 U3.9@18.747,25.638
  Bottom Layer w0.25: R35.2@13.36,18.468 13.585,18.693 14.063,18.693 14.21,18.84 v1(14.278,18.84)
NetR36_2: R36.2 U3.11 | length 8.1
  Top Layer w0.25: v1(19.115,18.84) 19.115,21.207 19.747,21.839 U3.11@19.747,25.638
  Bottom Layer w0.25: R36.2@18.186,18.468 18.411,18.693 18.9,18.693 19.047,18.84 v1(19.115,18.84)
NetR37_2: R37.2 U3.13 | length 9.3
  Top Layer w0.25: U3.13@20.747,25.638 20.747,22.715 23.997,19.465 23.997,18.848 v1(24.005,18.84)
  Bottom Layer w0.25: R37.2@23.012,18.468 23.237,18.693 23.791,18.693 23.938,18.84 v1(24.005,18.84)
NetR38_2: R38.2 U3.15 | length 12.9
  Top Layer w0.25: U3.15@21.747,25.638 21.747,23.209 24.37,20.586 27.75,20.586 28.9,19.436 v1(28.9,18.84)
  Bottom Layer w0.25: R38.2@27.859,18.468 28.084,18.693 28.685,18.693 28.832,18.84 v1(28.9,18.84)
NetR39_2: R39.2 U3.17 | length 16.5
  Top Layer w0.25: U3.17@22.747,25.638 22.747,23.654 24.845,21.556 31.775,21.556 33.599,19.732 v1(33.599,18.834)
  Bottom Layer w0.25: R39.2@32.634,18.468 32.859,18.693 33.385,18.693 33.532,18.84 v1@33.599,18.84
NetR40_2: R40.2 U3.19 | length 20
  Top Layer w0.25: U3.19@23.747,25.638 23.747,23.967 25.234,22.48 35.482,22.48 38.464,19.498 v1(38.464,18.834)
  Bottom Layer w0.25: R40.2@37.509,18.468 37.734,18.693 38.255,18.693 38.396,18.834 v1(38.464,18.834)
NetR41_2: R41.2 U3.21 | length 23.6
  Top Layer w0.25: U3.21@24.747,25.638 24.747,24.421 25.754,23.414 39.389,23.414 43.326,19.476 v1(43.326,18.834)
  Bottom Layer w0.25: R41.2@42.384,18.468 42.609,18.693 43.118,18.693 43.259,18.834 v1(43.326,18.834)
NetR42_2: R42.2 U3.23 | length 27.1
  Top Layer w0.25: U3.23@25.747,25.638 25.747,24.873 26.249,24.371 43.266,24.371 48.108,19.529 v1(48.108,18.834)
  Bottom Layer w0.25: R42.2@47.234,18.468 47.459,18.693 47.899,18.693 48.04,18.834 v1(48.108,18.834)
NetR43_2: R43.2 U3.25 | length 37.6
  Top Layer w0.25: U3.25@26.247,32.488 26.247,27.062 28.034,25.275 48.151,25.275 52.968,20.458 v1(52.968,18.834)
  Bottom Layer w0.25: R43.2@52.034,18.468 52.259,18.693 52.759,18.693 52.9,18.834 v1(52.968,18.834)
NetR57_1: R57.1 U1.2 U3.41 | length 10.5
  Top Layer w0.25: U3.41@18.247,32.488 18.247,33.297 20.075,35.125 20.417,35.125 R57.1@20.642,35.35 20.932,35.35 21.158,35.575 21.709,35.575 24.815,38.682 24.815,39.35 U1.2@24.99,39.525
NetR58_1: R58.1 U1.14 U3.42 U6.18 | length 43.8
  Top Layer w0.25: U3.42@17.747,32.488 17.747,34.815 18.282,35.35 R58.1@18.572,35.35 v1(18.572,34.625) ; U1.14@40.23,39.525 42.9,39.525 v1(43.35,39.075) 47.925,34.5 U6.18@49.925,34.5
  Bottom Layer w0.25: v1(18.572,34.625) 19.435,33.762 39.027,33.762 43.35,38.085 v1(43.35,39.075)
NetR59_1: R59.1 U1.15 U3.43 U6.15 | length 53.7
  Top Layer w0.25: v1(16.502,34.625) R59.1@16.502,35.35 16.792,35.35 17.247,34.895 U3.43@17.247,32.488 ; U1.15@40.23,48.925 40.23,45.006 44.185,41.052 46.926,38.31 U6.15@49.925,38.31
  Bottom Layer w0.25: v1(16.502,34.625) 17.819,33.308 39.472,33.308 44.184,38.02 v1(44.184,41.051)
NetR60_1: R60.1 U1.16 U3.44 U6.16 | length 57.4
  Top Layer w0.25: v1(14.432,34.625) R60.1@14.432,35.35 14.657,35.125 15,35.125 16.747,33.378 U3.44@16.747,32.488 ; U1.16@38.96,48.925 38.96,45.386 44.88,39.466 47.306,37.04 U6.16@49.925,37.04
  Bottom Layer w0.25: v1(14.432,34.625) 16.199,32.858 39.69,32.858 44.838,38.006 v1(44.838,39.424)
NetR71_1: R71.1 U1.11 U6.19 | length 17
  Top Layer w0.25: U1.11@36.42,39.525 36.399,39.504 v1(36.426,38.447) ; v1(42.095,38.447) 43.053,38.447 47.377,34.123 47.377,33.775 47.602,33.55 R71.1@47.834,33.55 48.009,33.375 49.255,33.375 49.4,33.23 U6.19@49.925,33.23
  Bottom Layer w0.25: v1(36.426,38.447) v1(42.095,38.447)
NetR72_1: R72.1 U1.12 U6.17 | length 30
  Top Layer w0.25: v1(37.69,37.55) U1.12@37.69,39.525 37.725,39.56 37.725,41.1 38.6,41.975 41.355,41.975 47.56,35.77 U6.17@49.925,35.77 ; v1(41.928,37.609) 42.977,37.609 45.416,35.171 45.416,33.775 45.641,33.55 R72.1@45.875,33.55 46.165,33.55 R72.1@46.39,33.775
  Bottom Layer w0.25: v1(37.69,37.55) 37.749,37.609 v1(41.928,37.609)
NetU1_25: U1.25 U2.3 | length 21.5
  Top Layer w0.254: U2.3@15.65,48.395 U2.3@15.5,48.545 17.008,48.545 17.09,48.627 17.227,48.627 v1(21.982,53.382) ; v1(21.982,55.4) 25.4,55.4 26.9,53.9 26.9,50.132 27.53,49.502 U1.25@27.53,48.925
  Bottom Layer w0.254: v1(21.982,53.382) v1(21.982,55.4)
NetU1_26: U1.26 U2.6 | length 16.8
  Top Layer w0.25: U1.26@26.26,48.925 U1.26@26.439,49.104
  Top Layer w0.254: U2.6@15.5,52.355 19.113,52.355 21.058,54.3 25.6,54.3 26.26,53.64 U1.26@26.26,48.925
pads on no net: J2.6 J6.1 U2.4 U2.5 U2.11 U2.14 U3.27 U3.28 U3.29 U3.32 U3.33 U3.38
copper on no net:
  other v1: -6.14,45.975 -6.14,54.975

## Polygon pours and split planes (outlines as drawn)
GND on Top Layer "Top Layer-GND" (solid, remove dead copper, pour order 17): -7.368,-2.032 67.691,-2.032 67.691,56.134 14.4,56.134 14.4,39.457 7.192,32.249 -7.364,32.249
NetC11_1 on Top Layer "NETC11_1_L01_P010" (solid, pour order 10): 1.696,44.95 1.7,56.134 -7.366,56.134 -7.366,44.95
no net on Top Layer "Top Layer-No Net" (solid, pour order 19): -7.365,32.249
no net on Top Layer "Top Layer-No Net 1" (solid, pour order 15): -7.368,32.254
GND on Bottom Layer "Bottom Layer-GND" (solid, pour order 29): -7.367,32.251 -7.366,-2.032 67.69,-2.032 67.691,56.134 14.408,56.134 14.391,56.117 14.391,39.466 7.17,32.251
NetC11_1 on Bottom Layer "NETC11_1_L02_P012" (solid, pour order 12): -7.366,44.95 1.7,44.95 1.7,56.15 1.675,56.175 -7.366,56.175
no net on Bottom Layer "Bottom Layer-No Net" (solid, pour order 27): -7.367,32.251
no net on Bottom Layer "Bottom Layer-No Net 1" (solid, pour order 25): 67.586,-1.874
no net on Bottom Layer "Bottom Layer-No Net 2" (solid, pour order 23): -7.366,-2.032
no net on Bottom Layer "Bottom Layer-No Net 3" (solid, pour order 21): -7.367,32.251
no net on Assembly Top (solid): -7.365,32.243

## Silkscreen, mask and mechanical layers (free items; w line width, h text height)
Top Overlay:
  lines w0.254: -7.325,32.25 7.188,32.25 ; -7.325,44.95 1.7,44.95 1.7,56.125 ; 7.197,32.25 14.408,39.462 ; 14.4,39.462 14.4,56.125
  text "ERROR" at 33.212,52.868 h1.5
  text "MCLR" at 40.945,50.557 h1.5
  text "+3.3V" at 43.534,50.557 h1.5
  text "GND" at 46.39,50.557 h1.5
  text "PGD" at 48.934,50.557 h1.5
  text "PGC" at 51.522,50.557 h1.5
  text "LV" at -6.975,42.875 h4
  text "TX" at 23.488,33.772 h1.5
  text "GND" at 28.293,33.777 h1.5
  text "RX" at 26.003,33.744 h1.5
  text "TS" at 1.292,28.088 h8
  text "+5V" at 64.548,26.677 h1.5
  text "+3.3V" at 64.188,21.894 h1.5
  text "AMS Slave" at 33.877,-1.083 h4
Bottom Overlay:
  drawing of 1347 lines, arcs and shapes, not listed
  text "TS" at 20.151,45.813 h8
  text "LV" at 2.146,42.796 h4
  text "www.pro-circuits.com" at 42.295,30.475 h4
  text "e-Tech Racing 2018-2019" at 28.224,26.149 h3
  text "Àlex Sánchez & Conrad Galli" at 29.482,23.428 h3

## Dimensions
1.7,44.95 to 14.4,39.462 on Top Overlay
1.7,44.95 to -7.325,32.25 on Bottom Overlay
1.7,56.125 to 14.4,56.125 on Bottom Overlay
1.7,44.95 to -7.325,32.25 on Top Overlay

## Text inside footprints (layer, text, board x,y; h text height)
D1: Top Overlay "+" at 27.8,50.3 h1.5
D2: Top Overlay "+" at 29.925,50.325 h1.5
D3: Top Overlay "+" at 32.025,50.325 h1.5
D4: Top Overlay "+" at 0.391,16.612 h1.5 r90
D5: Top Overlay "+" at 5.217,16.612 h1.5 r90
D6: Top Overlay "+" at 10.009,16.612 h1.5 r90
D7: Top Overlay "+" at 14.776,16.612 h1.5 r90
D8: Top Overlay "+" at 19.695,16.612 h1.5 r90
D9: Top Overlay "+" at 24.521,16.612 h1.5 r90
D10: Top Overlay "+" at 29.347,16.612 h1.5 r90
D11: Top Overlay "+" at 34.139,16.612 h1.5 r90
D12: Top Overlay "+" at 38.999,16.612 h1.5 r90
D13: Top Overlay "+" at 43.825,16.612 h1.5 r90
D14: Top Overlay "+" at 48.651,16.612 h1.5 r90
D15: Top Overlay "+" at 53.477,16.612 h1.5 r90
D17: Top Overlay "+" at 61.656,25.927 h1.5 r270
D18: Top Overlay "+" at 61.656,23.735 h1.5 r270
J2: Top Overlay "1" at 42.005,54.65 h1.5; Top Overlay "6" at 54.445,54.65 h1.5
J4: Top Overlay "1" at -0.12,1.7 h1.5; Top Overlay "13" at 29.85,1.7 h1.5
J5: Top Overlay "10" at 11.89,5.091 h1.5; Top Overlay "9" at 11.89,2.391 h1.5; Top Overlay "1" at -2.13,2.391 h1.5; Top Overlay "2" at -2.43,5.091 h1.5
J6: Top Overlay "1" at 44.621,48.7 h1.5; Top Overlay "8" at 62.141,48.7 h1.5